# Altium PCB Left_Flex.PcbDoc
Units mm, origin at the board's own origin, x right, y up, seen from the top; angles counter-clockwise.
Board outline 135.73 x 18.89 mm, 2 copper layers (Top Layer, Bottom Layer), stack 0.049 mm thick; 2 components, 23 nets, 88 pads, 137 vias.
Unrouted connection lines stored in the file: 47.
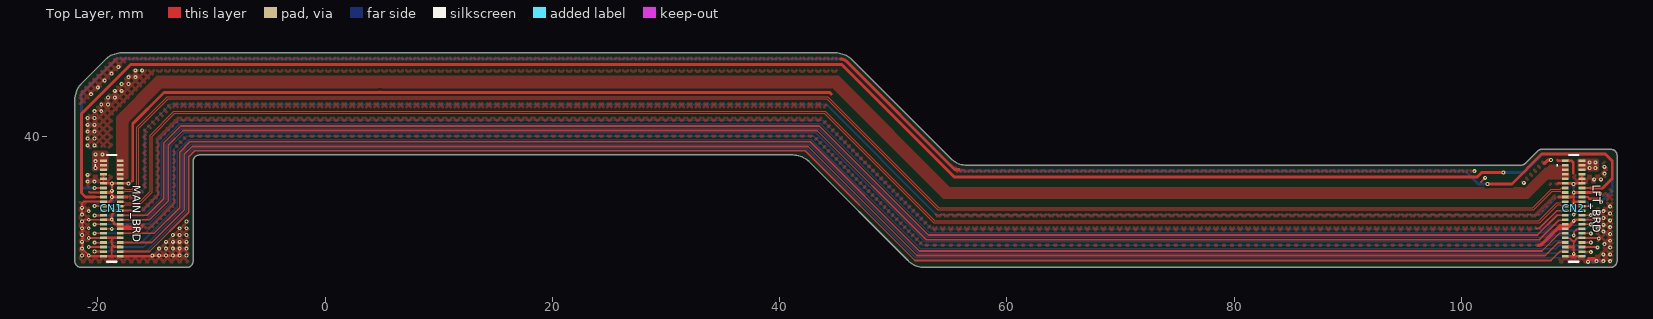
[diagram p0: Top Layer view]
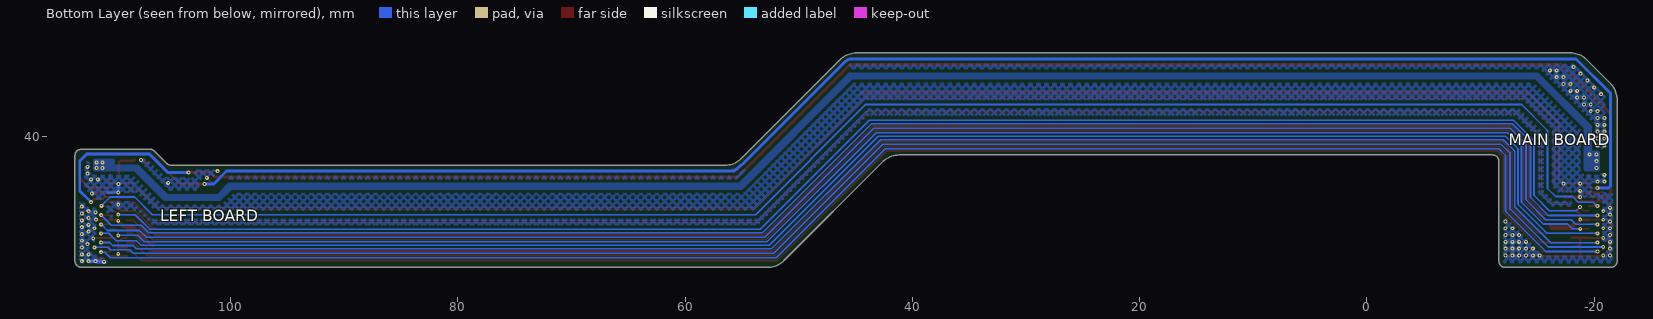
[diagram p1: Bottom Layer view, seen from below]

## Layer stack, top to bottom
Top Solder: solder mask 0.0275, Solder Resist, Dk 2.9
Top Layer: signal copper 0.012
Dielectric1: prepreg 0.025, FR-4, Dk 3.3
Bottom Layer: signal copper 0.012
Bottom Solder: solder mask 0.0275, Solder Resist, Dk 2.9

## Board outline
-21.461,28.446 -12.162,28.446 -12.173,28.446 ccw(c-12.173,29.002) -11.618,29.004 -11.619,28.969 -11.619,37.79 cw(c-11.064,37.792) -11.064,38.347 41.183,38.347 cw(c41.19,36.347) 42.634,37.731 51.288,29.077 ccw(c52.746,30.446) 52.753,28.446 113.113,28.446 ccw(c113.113,29.044) 113.711,29.046 113.714,38.292 113.713,38.292 ccw(c113.158,38.292) 113.156,38.847 113.186,38.847 107.075,38.847 107.107,38.847 ccw(c107.095,38.293) 106.684,38.665 105.646,37.627 cw(c105.236,38.001) 105.235,37.446 56.483,37.446 cw(c56.475,39.446) 55.061,38.032 46.348,46.745 ccw(c44.932,45.332) 44.925,47.332 -17.916,47.332 ccw(c-17.918,45.332) -19.337,46.741 -19.337,46.74 -21.403,44.674 ccw(c-20.019,43.23) -22.019,43.211 -22.019,29.02 -22.018,29.001 ccw(c-21.463,29.001)

## Design rules (kind name [scope] priority, off if disabled: settings)
BoardOutlineClearance Stiffener [OnLayer('Stiffener')] p1: gap=0 ignorepadtopadclearanceinfootprint=FALSE except(0.3: Track-OutlineEdge Track-CutoutEdge THPad-OutlineEdge THPad-CutoutEdge Via-OutlineEdge Via-CutoutEdge Fill-CutoutEdge Poly-CutoutEdge Region-CutoutEdge)
BoardOutlineClearance BoardOutlineClearanceAll [All] p2: gap=0 ignorepadtopadclearanceinfootprint=FALSE except(0.3: Track-OutlineEdge Track-CutoutEdge SMDPad-OutlineEdge THPad-OutlineEdge THPad-CutoutEdge Via-OutlineEdge Via-CutoutEdge Fill-OutlineEdge Fill-CutoutEdge Poly-OutlineEdge Poly-CutoutEdge Region-CutoutEdge)
Clearance [All] p1: gap=0.254 ignorepadtopadclearanceinfootprint=FALSE except(0: Via-Text Fill-Text Poly-Text Region-Text; 0.076: Arc-Arc Arc-Track Track-Track; 0.1: Arc-Via Track-Via; 0.127: SMDPad-SMDPad; 0.15: Arc-SMDPad Track-SMDPad Text-Text; 0.2: Arc-THPad Arc-Text Arc-Hole Track-THPad Track-Text Track-Hole SMDPad-THPad SMDPad-Via SMDPad-Text SMDPad-Hole THPad-THPad THPad-Via THPad-Text THPad-Hole Via-Via Via-Hole Fill-Hole Poly-Hole Region-Hole Text-Hole)
DiffPairsRouting [InDifferentialPairClass('All Differential Pairs')] p1: maxlimit=0.127 minlimit=0.127 mostfreqgap=0.127 toplayer_minwidth=0.052 toplayer_maxwidth=0.052 toplayer_prefwidth=0.052 bottomlayer_minwidth=0.052 bottomlayer_maxwidth=0.052 bottomlayer_prefwidth=0.052 maxuncoupledlength=12.7
HoleSize [All] p1: absolutevalues=TRUE maxlimit=7.62 minlimit=0.15 maxpercent=80.000 minpercent=20.000
HoleToHoleClearance [IsPad vs IsPad] p1: gap=0.45 allowstackedmicrovias=TRUE
MatchedLengths MatchedLengths_1 [All] p1: tolerance=0.127 checknetsindiffpair=TRUE checkdiffpairvsdiffpair=FALSE checkxsignals=FALSE checkothers=FALSE
MinimumAnnularRing [All] p1: minimumring=0.1
MinimumSolderMaskSliver [All] p1: minsoldermaskwidth=0
PlaneClearance [All] p1: clearance=0.3
PlaneConnect [All] p1: pad.planeconnectstyle=Relief pad.reliefexpansion=0.508 pad.reliefentries=4 pad.reliefconductorwidth=0.254 pad.reliefairgap=0.254 via.planeconnectstyle=Direct via.reliefexpansion=0.508 via.reliefentries=4 via.reliefconductorwidth=0.254 via.reliefairgap=0.254
PolygonConnect ALL [All] p1: connectstyle=Direct reliefconductorwidth=0.254 reliefentries=4 polygonreliefangle="90 Angle" airgapwidth=0.254
PolygonConnect 3V3 [InNet('+3V3')] p2: connectstyle=Direct reliefconductorwidth=0.254 reliefentries=4 polygonreliefangle="90 Angle" airgapwidth=0.254
PolygonConnect GND [InNet('GND')] p3: thpad.connectstyle=Relief thpad.reliefconductorwidth=0.254 thpad.reliefentries=4 thpad.polygonreliefangle="90 Angle" thpad.airgapwidth=0.254 smdpad.connectstyle=Relief smdpad.reliefconductorwidth=0.254 smdpad.reliefentries=4 smdpad.polygonreliefangle="90 Angle" smdpad.airgapwidth=0.254 via.connectstyle=Direct via.reliefconductorwidth=0.254 via.reliefentries=4 via.polygonreliefangle="90 Angle" via.airgapwidth=0.254
PolygonConnect 5V [InNet('+5V')] p4: connectstyle=Direct reliefconductorwidth=0.254 reliefentries=4 polygonreliefangle="90 Angle" airgapwidth=0.254
RoutingVias [All] p1: holewidth=0.15 width=0.35 viastyle="Through Hole" minholewidth=0.15 minwidth=0.35 maxholewidth=0.254 maxwidth=0.508
SMDNeckDown [All] p1: percent=200.000
SilkToSilkClearance [All] p1: silktosilkclearance=0.15
SilkToSolderMaskClearance SilkscreenOverComponentPads [IsPad] p1: minsilkscreentomaskgap=0.15 clearancetoexposedcopper=TRUE
SolderMaskExpansion [All] p1: expansion=0.1 istentingtop=FALSE
Width [All] p1: maxlimit=4 minlimit=0.051 preferedwidth=0.17
22 further rules are at their usual default settings.

## Classes and differential pairs
differential pair class "USB 2.0": E1 GD
differential pair GD: +GD_P -GD_N
differential pair E1: +E1_P -E1_N

## Components (designator, comment, footprint, x,y, rotation, side; value= is the part's Value field where it differs from the comment)
CN1 "MAIN_BRD" BM20B0840DP04V53 -18.769,33.647 r90 top locked
CN2 "LFT_BRD" BM20B0840DP04V53 109.889,33.647 r90 top locked

## Footprints (in the part's own frame and the unit in brackets; to place one, negate y for a bottom-side part, rotate by r counter-clockwise, add the part's x,y. Pads: shape width x height; smd on the part's side, far side on the other; paste and mask are expansions set on the pad)
BM20B0840DP04V53 [mm]
  rect 0.23x0.6 smd mask+0.1: 1(3.8,0.74) 2(3.8,-0.74) 3(3.4,0.74) 4(3.4,-0.74) 5(3,0.74) 6(3,-0.74) 7(2.6,0.74) 8(2.6,-0.74) 9(2.2,0.74) 10(2.2,-0.74) 11(1.8,0.74) 12(1.8,-0.74) 13(1.4,0.74) 14(1.4,-0.74) 15(1,0.74) 16(1,-0.74) 17(0.6,0.74) 18(0.6,-0.74) 19(0.2,0.74) 20(0.2,-0.74) 21(-0.2,0.74) 22(-0.2,-0.74) 23(-0.6,0.74) 24(-0.6,-0.74) 25(-1,0.74) 26(-1,-0.74) 27(-1.4,0.74) 28(-1.4,-0.74) 29(-1.8,0.74) 30(-1.8,-0.74) 31(-2.2,0.74) 32(-2.2,-0.74) 33(-2.6,0.74) 34(-2.6,-0.74) 35(-3,0.74) 36(-3,-0.74) 37(-3.4,0.74) 38(-3.4,-0.74) 39(-3.8,0.74) 40(-3.8,-0.74) MP1(4.2,0.74) MP2(4.2,-0.74) MP3(-4.2,0.74) MP4(-4.2,-0.74)
  silkscreen extent -4.7,-0.4 4.7,1.5, body extent -4.7,-1.02 4.7,1.02, height 0.86

## Part data
CN1 CN2: library part BM20B(0.8)-40DP-0.4V(53), "Connector", Manufacturer_Name=Hirose, Manufacturer_Part_Number=BM20B(0.8)-40DP-0.4V(51), Supplier Part Number 1=798-BM20B0840DP04V53, Datasheet Link=https://www.hirose.com/en/product/document?clcode=CL0684-9005-6-51&productname=BM20B(0.8)-40DP-0.4V(51)&series=BM20&documenttype=2DDrawing&lang=en&documentid=0000948948, Height=0.76mm, Supplier 1=Mouser, System=Connector

## Via types
v1: diameter 0.35, hole 0.15, Top Layer to Bottom Layer, tented both sides, 137 vias

## Nets (pads, with @x,y where several pads share a name; then routed paths per layer and width w, separated by ;. In a path a pad name is that pad's centre, name@x,y a point inside that pad or via, vN(x,y) a via of type N, cw(c..) or ccw(c..) an arc to the next point about the centre after c; other vN are vias at no path point)
+3V3: CN1.1 CN1.3 CN1.MP1 CN2.2 CN2.4 CN2.MP2
  other v1: -20.2,37.2 111.3,37.2 111.8,37.2 111.3,37.7 111.8,37.7 -20.2,37.8 -20.2,38.4 -19.6,38.4
+5V: CN1.2 CN1.4 CN1.6 CN1.8 CN1.MP2 CN2.1 CN2.3 CN2.5 CN2.7
ACT: CN1.24 CN2.23 | length 138
  Top Layer w0.15: CN1.24 -15.653,33.047 -14.2,34.5 -14.2,39.4 -12.7,40.9 43.5,40.9 53.1,31.3 106.7,31.3 108.447,33.047 CN2.23
DOWN: CN1.31 CN2.32 | length 144
  Top Layer w0.15: v1(-20.275,31.45) -19.512,31.45 CN1.31 ; CN2.32 v1(111.4,31.447)
  Bottom Layer w0.15: v1(-20.275,31.45) -15.85,31.45 -13.3,34 -13.3,38.9 -12.2,40 43,40 52.6,30.4 107.896,30.4 108.296,30.8 110.1,30.8 110.747,31.447 v1(111.4,31.447)
E1_N: CN1.20 CN2.19 | length 138.1
  Top Layer w0.052: CN1.20 -17.703,33.847 -17.592,33.957 -16.326,33.957 -15.221,35.062 -15.221,40.004 -13.225,42 43.95,42 53.581,32.369 106.897,32.369 108.486,33.957 108.713,33.957 108.823,33.847 CN2.19
E1_P: CN1.18 CN2.17 | length 138.1
  Top Layer w0.052: CN1.18 -17.703,34.247 -17.592,34.136 -16.4,34.136 -15.4,35.137 -15.4,40.078 -13.299,42.179 44.024,42.179 53.655,32.548 106.823,32.548 108.411,34.136 108.713,34.136 108.823,34.247 CN2.17
FLT: CN1.36 CN2.35 | length 138
  Top Layer w0.15: CN1.36 -15.253,30.647 -12.4,33.5 -12.4,38.4 -11.7,39.1 42.5,39.1 52.1,29.5 107.4,29.5 108.547,30.647 CN2.35
GD_N: CN1.12 CN2.11 | length 138.3
  Top Layer w0.052: CN1.12 -17.703,35.447 -17.592,35.336 -16.989,35.336 -16.575,35.75 -16.575,40.775 -13.875,43.475 44.225,43.475 54,33.7 106.3,33.7 107.936,35.336 108.713,35.336 108.823,35.447 CN2.11
GD_P: CN1.14 CN2.13 | length 138.3
  Top Layer w0.052: CN1.14 -17.703,35.047 -17.592,35.157 -16.914,35.157 -16.396,35.676 -16.396,40.701 -13.801,43.296 44.151,43.296 53.926,33.521 106.374,33.521 108.011,35.157 108.713,35.157 108.823,35.047 CN2.13
GND: CN1.5 CN1.7 CN1.9 CN1.10 CN1.13 CN1.16 CN1.17 CN1.22 CN1.25 CN1.28 CN1.30 CN1.33 CN1.34 CN1.38 CN1.MP3 CN1.MP4 CN2.6 CN2.8 CN2.9 CN2.10 CN2.14 CN2.15 CN2.18 CN2.21 CN2.26 CN2.27 CN2.29 CN2.33 CN2.34 CN2.37 CN2.MP1 CN2.MP3 CN2.MP4 | length 152.4
  Top Layer w0.15: -18.115,32.08 -18.115,32.207 CN1.28@-18.075,32.247 ; 106.575,31.9 106.875,31.9 108.422,33.447 CN2.21
  Top Layer w0.17: v1(-21.4,33.1) -21.4,34.1 -21.253,34.247 CN1.17 ; v1(-20.8,31.05) -20.797,31.047 CN1.33 ; -20.775,35.1 -20.722,35.047 CN1.13 CN1.13@-19.494,35.032 ; -20.61,29.432 -20.644,29.466 -20.766,29.466 -21.348,30.048 -21.348,32.547 -21.249,32.647 v1(-20.8,32.647) CN1.25 CN1.25@-19.506,32.65 ; CN1.MP3@-19.524,29.432 CN1.MP3 ; CN1.9 CN1.7 CN1.5 ; -18.803,34.398 -18.803,34.616 v1(-18.769,34.65) ; v1@-18.798,35.191 v1(-18.768,35.191) v1(-18.769,34.65) ; -18.778,29.447 -18.775,29.45 ; -18.778,31.047 -18.775,31.05 ; -18.775,33.1 v1(-18.775,32.65) -18.583,32.458 -18.583,32.347 ; -18.772,29.447 -18.775,29.45 ; -18.772,31.047 -18.775,31.05 ; v1(-18.768,35.191) v1(-18.769,35.847) ; CN1.22@-18.046,33.43 CN1.22 -17.048,33.447 ; CN1.38@-18.038,30.256 CN1.38 ; -17.428,34.647 -17.425,34.65 ; v1@-17.322,35.847 v1(-17.3,35.825) ; v1@-12.826,29.473 v1(-12.8,29.5) v1(-12.8,30.1) ; 101.724,35.959 101.727,35.959 v1(102.1,36.332) ; CN2.33 109.177,31.019 109.556,31.019 109.875,30.7 ; v1(109.9,29.65) 109.9,30.247 109.9,30.675 ; 109.9,30.725 110.222,31.047 CN2.34 110.653,31.023 112.076,31.023 v1(112.1,31) ; v1(109.9,32.55) v1@109.997,32.647 ; 109.9,33.7 109.9,34.247 109.9,34.647 v1(109.9,35.047) ; CN2.26 111.847,32.647 v1(111.85,32.65) ; CN2.10 CN2.6 ; -18.775,29.45 -18.775,30.256 -18.665,30.365 -18.775,30.475 -18.775,31.05
  Top Layer w0.2: 108.5,31.9 108.553,31.847 CN2.29
  Top Layer w0.23: -20.61,29.432 CN1.MP3@-19.524,29.432 ; CN1.13@-19.563,35.047 CN1.13 v1@-18.837,35.047 ; CN1.MP3 -18.778,29.447 ; CN1.33 -18.778,31.047 ; CN1.17 -18.954,34.247 -18.803,34.398 ; CN1.9 v1(-18.769,35.847) CN1.10 v1@-17.322,35.847 ; CN1.25@-19.506,32.65 v1(-18.775,32.65) ; -18.775,33.1 -18.445,33.43 CN1.22@-18.046,33.43 ; -18.772,29.447 -15.285,29.447 -15.232,29.5 v1(-15.2,29.5) ; -18.772,31.047 CN1.34 ; v1(-18.769,34.65) -18.766,34.647 CN1.16 -17.428,34.647 ; -18.665,30.365 -18.556,30.256 CN1.38@-18.038,30.256 ; -18.583,32.347 -18.484,32.247 CN1.28 ; v1@-15.2,29.473 v1@-12.826,29.473 ; 108.546,35.847 CN2.9 109.699,35.847 ; 108.588,34.647 CN2.15 109.9,34.647 ; CN2.MP3 109.877,29.447 ; CN2.37 109.9,30.247 ; CN2.21 109.647,33.447 109.9,33.7 ; v1(109.875,35.8) 109.907,35.8 109.954,35.847 CN2.10 ; v1(109.9,29.65) 109.9,29.447 CN2.MP4 ; 109.9,34.247 CN2.18 ; v1(109.9,35.047) 112.022,35.047 ; v1@109.997,32.647 CN2.26
  Top Layer w0.25: -16.98,36.051 -16.925,36.106 -16.925,41.1 -14.175,43.85 4.775,43.85 4.825,43.9 4.875,43.85 44.425,43.85 44.55,43.725 ; 45.375,46.792 cw(c45.375,46.027) 45.917,46.568 55.405,37.08 55.811,37.08 ; 108.475,37.9 108.528,37.847 CN2.MP1 109.703,37.847 109.85,37.7 109.85,36.736
  Top Layer w0.3: -18.205,32.055 CN1.30@-18.099,31.949 ; -16.289,31.95 -16.121,32.118 ; 106.8,30.4 ccw(c106.8,30.883) 107.141,30.541 108.5,31.9 108.7,32.1 ; 107.3,37.6 107.6,37.9 v1(107.9,37.9) ; 109.5,32.1 v1@109.9,32.5 ; v1(111.15,28.95) 111.15,28.964 111.233,29.047 111.233,29.199 111.691,29.199
  Top Layer w0.32: 108.7,32.1 109.5,32.1
  Top Layer w0.4: CN1.30@-18.125,31.95 -16.289,31.95
  Bottom Layer w0.17: v1(109.875,35.8) 109.875,35.072 v1(109.9,35.047) 110.875,35.047 110.9,35.072
  Bottom Layer w0.3: v1(111.15,28.95) 111.836,28.95 111.886,29 v1(111.9,29) 111.91,28.99 112.223,28.99 112.239,28.975 112.461,28.975 112.486,29 v1(112.5,29)
  other v1: 113.1,29 -21.4,29.5 -20.8,29.5 -14.6,29.5 -14,29.5 -13.4,29.5 -12.2,29.5 112.5,29.6 113.1,29.6 -21.4,30.1 -14.6,30.1 -14,30.1 -13.4,30.1 -12.2,30.1 113.1,30.2 112.6,30.5 -21.4,30.7 -14,30.7 -13.4,30.7 -12.8,30.7 -12.2,30.7 113.1,30.8 -21.4,31.3 -13.4,31.3 -12.8,31.3 -12.2,31.3 113.1,31.4 112.5,31.6 -21.4,31.9 -20.8,31.9 -12.8,31.9 -12.2,31.9 112,31.9 113.1,32 112.5,32.2 -21.4,32.5 -12.2,32.5 113.1,32.6 112.5,32.8 113.1,33.2 111.9,33.3 -20.8,33.4 112.5,33.4 -21.4,33.7 113.1,33.8 109.9,33.974 112.225,34.95 105.5,35.9 -20.9,36 -20.3,36 111.7,36.2 112.3,36.2 -20.9,36.6 112.6,36.7 101.15,36.925 112.6,37.3 -20.9,39.2 -20.3,39.2 -20.9,39.8 -20.3,39.8 -20.9,40.4 -20.3,40.4 -20.9,41 -20.3,41 -20.9,41.6 -20.3,41.6 -20.3,42.2 -19.7,42.2 -19.7,42.8 -19.1,42.8 -19.1,43.4 -18.5,43.4 -20.6,43.7 -18.5,44 -17.9,44 -20,44.3 -17.9,44.6 -17.3,44.6 -19.4,44.9 -17.3,45.2 -16.7,45.2 -18.8,45.5 -16.7,45.8 -16.1,45.8 -18.2,46.1
HK/MISO: CN1.23 CN2.24 | length 144.1
  Top Layer w0.15: v1(-20.275,33.025) -19.531,33.025 CN1.23 ; CN2.24 110.632,33.05 v1(111.4,33.05)
  Bottom Layer w0.15: v1(-20.275,33.025) -15.975,33.025 -14.4,34.6 -14.4,39.5 -12.8,41.1 43.6,41.1 53.2,31.5 107.2,31.5 107.86,32.16 110.51,32.16 v1(111.4,33.05)
L1/SCK: CN1.19 CN2.20 | length 144.9
  Top Layer w0.15: v1(-20.275,33.85) -19.512,33.85 CN1.19 ; CN2.20 111.371,33.847 v1(111.393,33.869)
  Bottom Layer w0.15: v1(-20.275,33.85) -19.925,34.2 -18.6,34.2 -18.108,34.692 -16.608,34.692 -15.9,35.4 -15.9,40.5 -13.6,42.8 44.1,42.8 53.8,33.1 106.9,33.1 108.447,34.647 110.615,34.647 v1(111.393,33.869)
L2: CN1.37 CN2.38 | length 146.3
  Top Layer w0.15: v1(-20.8,30.247) CN1.37 ; CN2.38 111.978,30.247 v1(112,30.225)
  Bottom Layer w0.15: v1(-20.8,30.247) -15.953,30.247 -12.6,33.6 -12.6,38.5 -11.8,39.3 42.6,39.3 52.2,29.7 108.6,29.7 108.9,30 110.6,30 110.825,30.225 v1(112,30.225)
L3/MOSI: CN1.29 CN2.30 | length 141.1
  Top Layer w0.15: CN1.29 -18.778,31.847 v1(-18.775,31.85) ; v1(109.9,31.275) 109.92,31.295 109.92,31.57 110.171,31.821 110.603,31.821 CN2.30
  Bottom Layer w0.15: v1(-18.775,31.85) -18.1,31.85 -17.675,32.275 -15.525,32.275 -13.6,34.2 -13.6,39.1 -12.4,40.3 43.2,40.3 52.8,30.7 107.596,30.7 108.171,31.275 v1(109.9,31.275)
LEFT: CN1.35 CN2.36 | length 144.1
  Top Layer w0.15: v1(-20.275,30.625) -19.531,30.625 CN1.35 ; CN2.36 v1(111.4,30.647)
  Bottom Layer w0.15: v1(-20.275,30.625) -16.175,30.625 -13,33.8 -13,38.7 -12,39.7 42.8,39.7 52.4,30.1 108.3,30.1 108.575,30.375 110.375,30.375 110.647,30.647 v1(111.4,30.647)
LX: CN1.15 CN2.16 | length 156.6
  Top Layer w0.17: -20.275,34.65 CN1.15@-19.512,34.65 ; CN2.16 111.153,34.647 111.3,34.5
  Top Layer w0.25: -20.275,34.65 -21.075,34.65 -21.425,35 -21.425,41.975 -17.1,46.3 45.475,46.3 55.375,36.4 101.4,36.4 101.8,36.8 v1(103.7,36.8) ; 111.3,34.5 112,34.5 v1(112.3,34.2)
  Bottom Layer w0.25: v1(103.7,36.8) 105.549,36.8 107.171,38.422 112.678,38.422 113.286,37.814 113.286,35.186 v1(112.3,34.2)
LY: CN1.11 CN2.12 | length 156.5
  Top Layer w0.17: v1@-20.275,35.475 -20.247,35.447 CN1.11 ; CN2.12 111.397,35.447
  Top Layer w0.25: v1(102.3,35.8) 104.45,35.8 107.07,38.42 107.08,38.422 112.678,38.422 113.286,37.814 113.286,36.286 112.447,35.447 111.397,35.447
  Bottom Layer w0.25: v1(-20.275,35.45) -21.25,35.45 -21.425,35.625 -21.425,43.775 -18.4,46.8 45.505,46.8 45.677,46.729 45.916,46.569 45.936,46.556 54.885,37.607 55.043,37.475 55.72,36.925 100.375,36.925 101.5,35.8 v1(102.3,35.8)
PORT_EN: CN1.32 CN2.31 | length 138
  Top Layer w0.15: CN1.32 -15.053,31.447 -12.8,33.7 -12.8,38.6 -11.9,39.5 42.7,39.5 52.3,29.9 107.1,29.9 108.647,31.447 CN2.31
PWR: CN1.26 CN2.25 | length 138
  Top Layer w0.15: CN1.26 -15.453,32.647 -13.8,34.3 -13.8,39.2 -12.5,40.5 43.3,40.5 52.9,30.9 106.875,30.9 108.582,32.607 109.109,32.607 CN2.25
RIGHT: CN1.39 CN2.40 | length 144.1
  Top Layer w0.15: v1@-20.288,29.845 -20.286,29.847 CN1.39 ; CN2.40 110.653,29.823 111.377,29.823 v1(111.4,29.8)
  Bottom Layer w0.15: v1(-20.3,29.85) -15.75,29.85 -12.2,33.4 -12.2,38.3 -11.6,38.9 42.4,38.9 52,29.3 110.6,29.3 111.1,29.8 v1(111.4,29.8)
SELECT: CN1.21 CN2.22 | length 141.1
  Top Layer w0.15: CN1.21 -19.028,33.447 v1@-18.75,33.725 ; v1(109.9,33.1) 110.247,33.447 CN2.22
  Bottom Layer w0.15: v1(-18.75,33.775) -18.427,33.452 -16.048,33.452 -14.7,34.8 -14.7,39.6 -12.9,41.4 43.8,41.4 53.4,31.8 107.1,31.8 108.4,33.1 v1(109.9,33.1)
SYS: CN1.40 CN2.39 | length 138
  Top Layer w0.15: CN1.40 -15.453,29.847 -12,33.3 -12,38.2 -11.478,38.722 42.265,38.722 51.921,29.065 107.89,29.065 108.672,29.847 CN2.39
UP: CN1.27 CN2.28 | length 144
  Top Layer w0.15: v1(-20.275,32.25) -19.512,32.25 CN1.27 ; CN2.28 110.632,32.25 v1(111.4,32.25)
  Bottom Layer w0.15: v1(-20.275,32.25) -18.375,32.25 -17.975,32.65 -15.75,32.65 -14,34.4 -14,39.3 -12.6,40.7 43.4,40.7 53,31.1 107.4,31.1 108,31.7 110.85,31.7 v1(111.4,32.25)

## Polygon pours and split planes (outlines as drawn)
+5V on Top Layer "+5V_L01_P001" (solid, pour order 1): 105.7,35.5 107.7,37.5 108.775,37.5 108.805,37.536 108.796,37.731 108.884,37.819 109.408,37.819 109.495,37.731 109.5,36.2 107.6,36.2 105.9,34.5 54.4,34.5 44.7,44.2 -14.3,44.2 -17.2,41.3 -17.2,36.2 -18.315,36.2 -18.4,36.285 -18.4,41.7 -14.8,45.3 45.2,45.3 55,35.5
GND on Top Layer "GND_L01_P010" (hatched 45Degree grid 0.5 track 0.25, remove dead copper, pour order 10): -22.981,49.012 -23.981,48.012 -23.981,28.012 -22.981,27.012 115.019,27.012 116.019,28.012 116.019,48.012 115.019,49.012 30.019,49.012
+3V3 on Top Layer "+3V3_L01_P003" (solid, pour order 3): -19.2,36.9 -20.4,36.9 -20.5,37 -20.5,38.6 -20.4,38.7 -19.2,38.7 -19.1,38.6 -19.1,37
+3V3 on Top Layer "+3V3_L01_P005" (solid, pour order 5): 110.3,38 110.2,37.9 110.2,37 110.3,36.9 112,36.9 112.1,37 112.1,37.9 112,38
GND on Bottom Layer "GND_L02_P008" (hatched 45Degree grid 0.5 track 0.25, remove dead copper, pour order 8): -25.4,49 -26.4,48 -26.4,28 -25.4,27 112.6,27 113.6,28 113.6,48 112.6,49 27.6,49
+3V3 on Bottom Layer "+3V3_L02_P004" (solid, pour order 4): -20.5,38.6 -20.5,37 -20.4,36.9 -19.2,36.9 -19.1,37 -19.1,40.7 -14.8,45 45.3,45 55,35.3 99.9,35.3 100.9,34.3 105.9,34.3 108.5,36.9 112,36.9 112.1,37 112.1,37.9 112,38 110.3,38 110.2,37.9 110.2,37.55 110.15,37.5 108.15,37.5 105.55,34.9 101.2,34.9 100.2,35.9 55.3,35.9 45.6,45.6 -15.1,45.6 -19.8,40.9 -19.8,38.8 -19.9,38.7 -20.4,38.7
no net on Bottom Courtyard "NONET_L01_P-001" (solid): -22.019,29 ccw(c-21.463,29) -21.463,28.444 -12.165,28.444 ccw(c-12.165,28.99) -11.619,28.99 -11.619,38.219 ccw(c-12.086,38.219) -12.086,38.686 -21.492,38.686 ccw(c-21.492,38.159) -22.019,38.159
no net on Bottom Courtyard "NONET_L01_P-001" (solid): 107.648,38.849 107.493,38.849 ccw(c107.493,38.177) 106.821,38.177 106.821,29.158 ccw(c107.533,29.158) 107.533,28.446 113.13,28.446 ccw(c113.13,29.024) 113.708,29.024 113.708,38.294 ccw(c113.155,38.294) 113.155,38.847 ccw(c110.415,-899.771) 107.674,38.847
no net on Bottom Courtyard "NONET_L01_P-001" (solid): -22.018,38.057 -22.018,29.043 ccw(c-21.422,29.043) -21.421,28.446 -15.478,28.446 -12.154,28.446 ccw(c-12.154,28.982) -11.618,28.982 -11.62,38.02 ccw(c-12.233,38.02) -12.233,38.633 -21.436,38.639 ccw(c-21.436,38.057)
no net on Bottom Courtyard "NONET_L01_P-001" (solid): 106.9,38.2 106.9,29 ccw(c107.454,29) 107.454,28.446 113.146,28.446 ccw(c113.146,29.004) 113.703,29.003 113.713,38.312 ccw(c113.182,38.312) 113.182,38.843 107.547,38.847 ccw(c107.546,38.2)

## Silkscreen, mask and mechanical layers (free items; w line width, h text height)
Bottom Overlay:
  text "MAIN BOARD" at -12.5,39.2 h1
  text "LEFT BOARD" at 106.224,32.519 h1
Board Outline:
  lines w0.15: -22.019,29.02 -22.019,43.211 cw(c-20.019,43.23) -21.403,44.674 -19.337,46.74 -19.337,46.741 cw(c-17.918,45.332) -17.916,47.332 44.925,47.332 ; -22.018,29.001 ccw(c-21.463,29.001) -21.461,28.446 ; -21.45,28.446 -12.162,28.446 ; -12.173,28.446 ccw(c-12.173,29.002) -11.618,29.004 ; -11.619,28.969 -11.619,37.79 cw(c-11.064,37.792) -11.064,38.347 41.183,38.347 cw(c41.19,36.347) 42.634,37.731 ; 44.925,47.332 cw(c44.932,45.332) 46.348,46.745 55.061,38.032 ccw(c56.476,39.446) 56.483,37.446 105.235,37.446 ccw(c105.236,38.001) 105.646,37.627 106.684,38.665 ; 107.075,38.847 113.186,38.847 ; 107.107,38.847 ccw(c107.095,38.293) 106.684,38.665 ; 113.156,38.847 cw(c113.158,38.292) 113.713,38.292 ; 113.714,38.292 113.711,29.046 cw(c113.113,29.044) 113.113,28.446 52.753,28.446 cw(c52.746,30.446) 51.288,29.077 42.634,37.731 ; 42.634,37.731 42.634,37.731 ; 106.684,38.665 106.684,38.665
Stiffener:
  lines w0.15: -18.275,27.95 -7.65,26.5 ; 24.575,24.8 109.6,27.6
  text "Stiffener: Stainless Steel" at -6.425,26.675 h0.7
  text "Stiffener Thickness: 0.2mm" at -6.425,25.475 h0.7
  text "Stiffener Location: Shown on this layer(GM20)" at -6.425,24.308 h0.7
  text "Place under bottom layer side opposite the exposed pads" at -6.45,23.083 h0.7

## Dimensions
-19.169,28.947 to -12.162,28.446 on Bottom Courtyard
109.489,28.947 to 113.113,28.446 on Bottom Courtyard
-18.659,49.6 to -11.064,38.347 on Bottom Courtyard
105.235,37.446 to 107.107,38.847 on Bottom Courtyard
45.699,48.604 to 55.972,39.935 on Bottom Courtyard
56.483,37.446 to 44.925,47.332 on Bottom Courtyard
-17.916,47.332 to -11.064,38.347 on Bottom Courtyard
-18.769,27.746 to 109.889,39.752 on Bottom Courtyard
113.711,29.046 to 51.902,27.696 on Bottom Courtyard
113.113,28.446 to 113.186,38.847 on Bottom Courtyard
107.107,38.847 to 113.713,38.292 on Bottom Courtyard
106.684,38.665 to 105.235,37.446 on Bottom Courtyard
55.972,38.032 to 105.235,37.446 on Bottom Courtyard
46.132,47.482 to 105.235,37.446 on Bottom Courtyard
41.19,38.347 to 50.45,27.3 on Bottom Courtyard
-11.619,37.79 to 41.183,38.347 on Bottom Courtyard
-12.162,28.446 to -11.064,38.347 on Bottom Courtyard
-18.659,47.435 to 56.483,37.446 on Bottom Courtyard
-22.177,43.959 to -18.659,47.435 on Bottom Courtyard
109.889,39.602 to 113.713,38.292 on Bottom Courtyard
109.889,38.607 to 114.189,38.504 on Bottom Courtyard
109.149,37.847 to 109.889,38.607 on Bottom Courtyard
-18.769,42.335 to -11.619,42.181 on Bottom Courtyard
-18.769,42.335 to 42.231,24.99 on Bottom Courtyard
-18.029,37.847 to -18.769,38.347 on Bottom Courtyard
-18.029,37.847 to 109.149,37.847 on Bottom Courtyard
-19.509,37.847 to -18.029,37.847 on Bottom Courtyard
-18.029,29.447 to 109.149,29.447 on Bottom Courtyard
-18.029,33.847 to -17.752,33.647 on Bottom Courtyard